# Altium PCB PCB1.PcbDoc
Units mm, origin at the board's own origin, x right, y up, seen from the top; angles counter-clockwise.
Board outline 125.98 x 68.96 mm, 2 copper layers (Top Layer, Bottom Layer); 7 components, 7 nets, 50 pads, 6 vias.
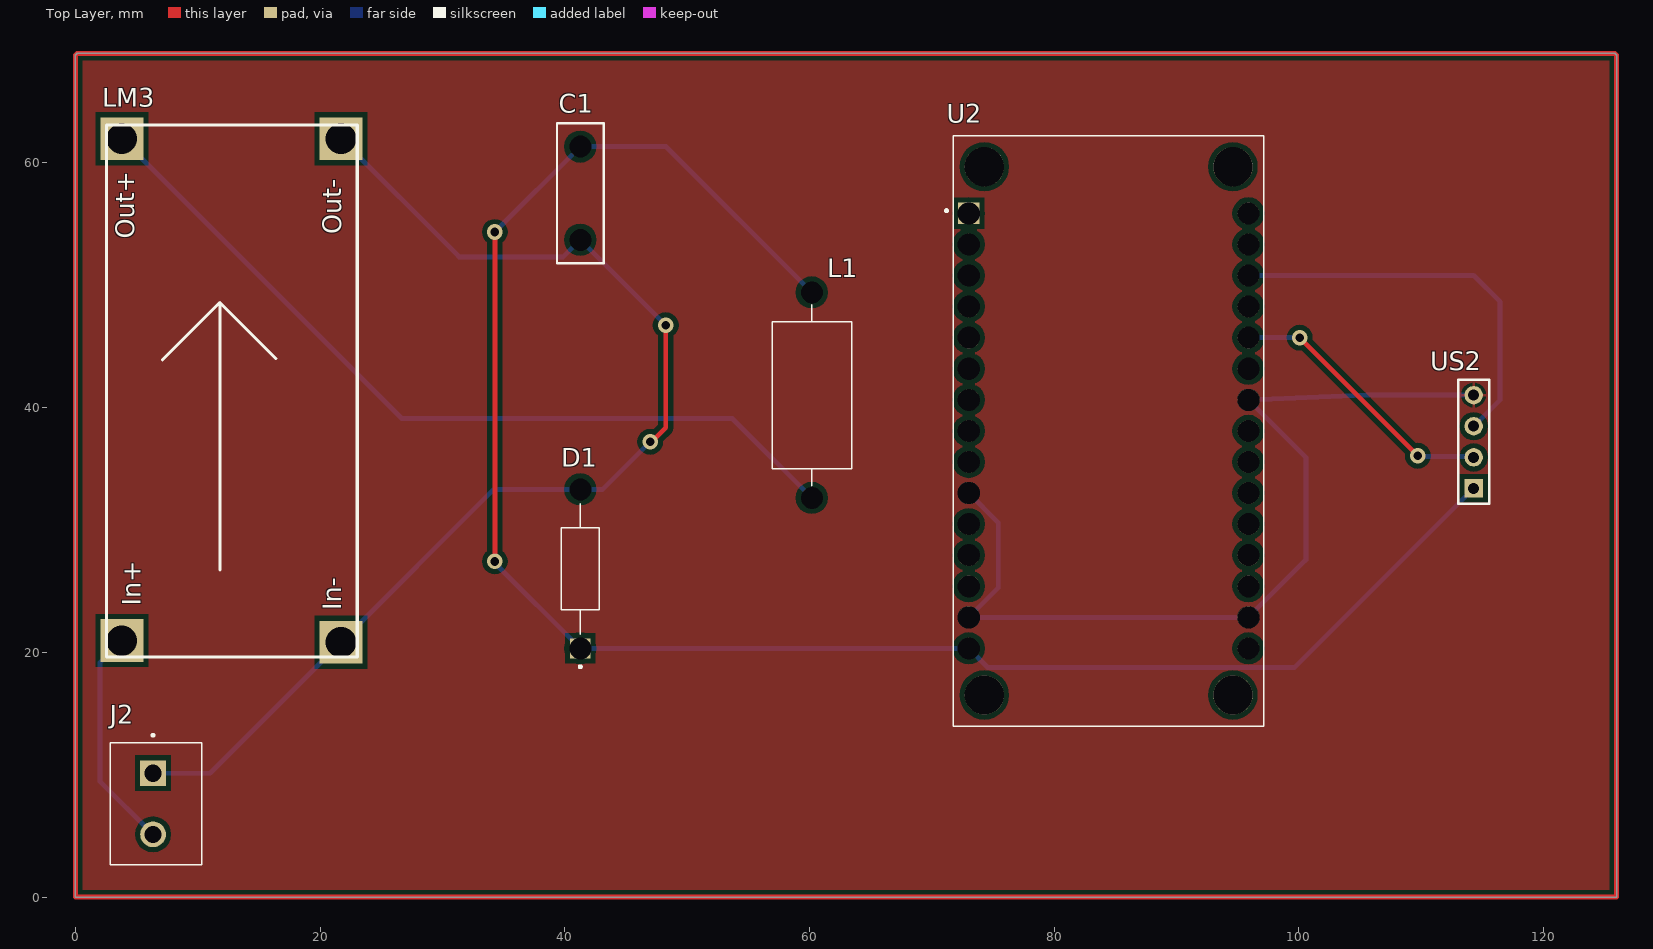
[diagram p0: Top Layer view]
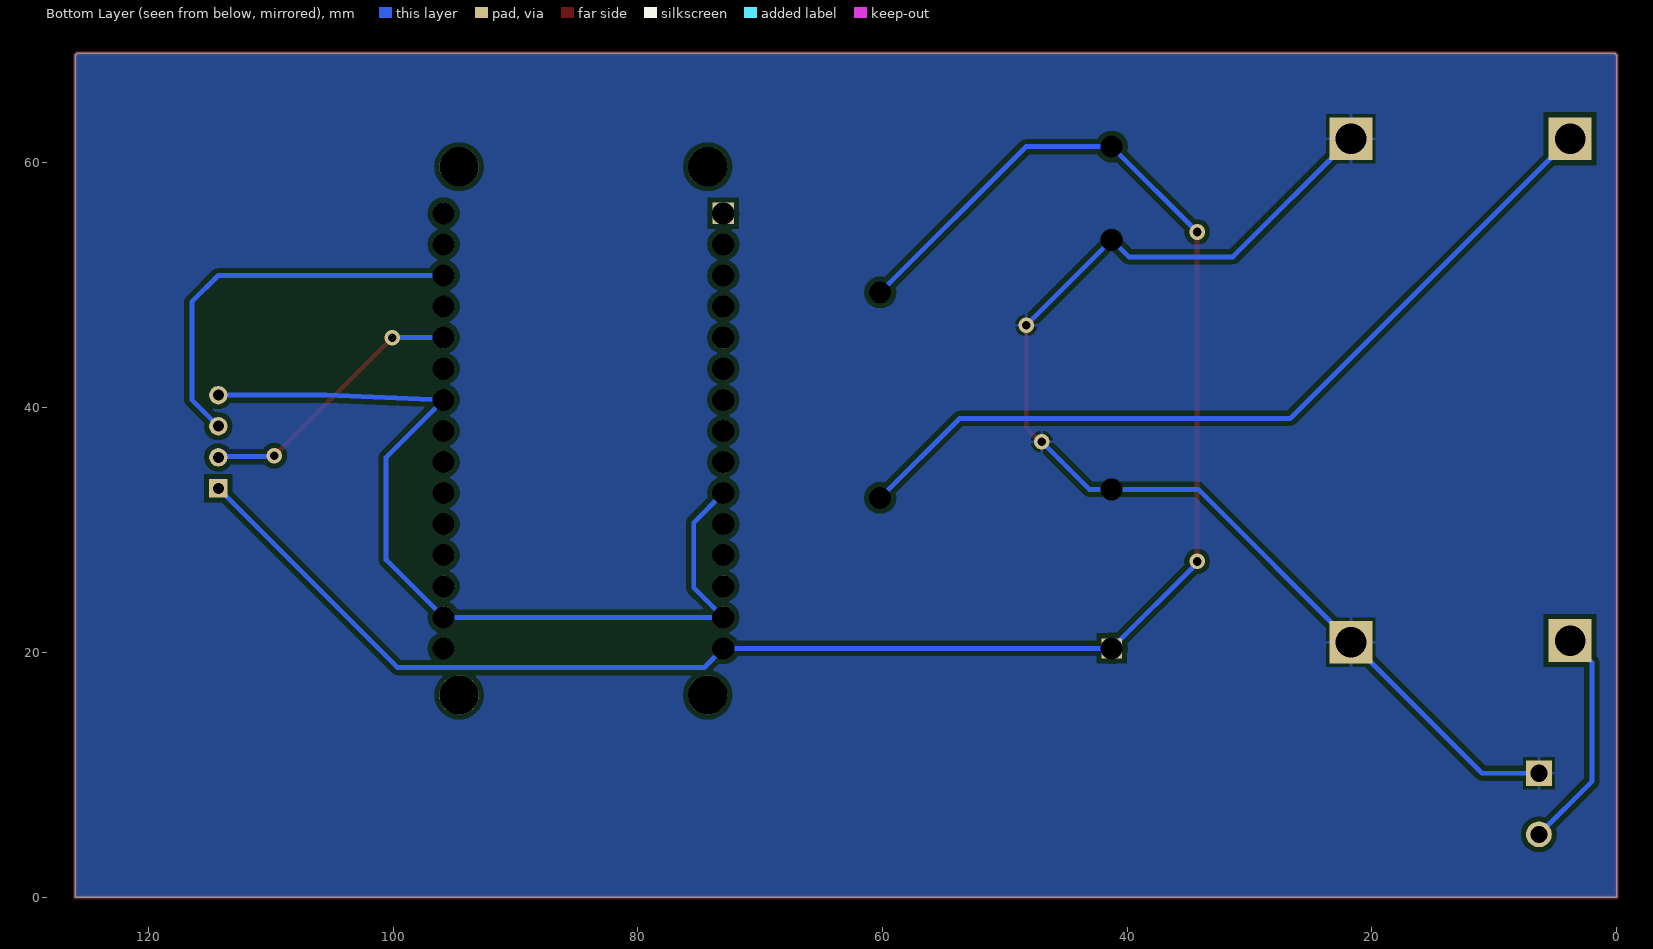
[diagram p1: Bottom Layer view, seen from below]

## Layer stack, top to bottom
Top Solder: solder mask 0.0102, Solder Resist, Dk 3.5
Top Layer: signal copper 0.0356
Dielectric 1: dielectric 0.32, FR-4, Dk 4.8
Bottom Layer: signal copper 0.0356
Bottom Solder: solder mask 0.0102, Solder Resist, Dk 3.5

## Board outline
0,0 0,68.812 0.149,68.961 125.835,68.961 125.984,68.812 125.984,0

## Design rules (kind name [scope] priority, off if disabled: settings)
Clearance PGND [InNamedPolygon('NONET_L01_P001')] p1: gap=0.7 ignorepadtopadclearanceinfootprint=FALSE
Clearance DGND [InNamedPolygon('NONET_L01_P000')] p2: gap=0.7 ignorepadtopadclearanceinfootprint=FALSE
Clearance [All] p3: gap=0.4 ignorepadtopadclearanceinfootprint=FALSE
PolygonConnect [All] p1: connectstyle=Relief reliefconductorwidth=0.254 reliefentries=4 polygonreliefangle="90 Angle" airgapwidth=0.254
RoutingVias [All] p1: holewidth=0.6 width=1.4 viastyle="Through Hole" minholewidth=0.6 minwidth=1.4 maxholewidth=0.6 maxwidth=1.4
SolderMaskExpansion [All] p1: expansion=0.18 istentingtop=FALSE
UnRoutedNet [All] p1: checkbadconnections=TRUE
Width [All] p1: maxlimit=0.4 minlimit=0.4 preferedwidth=0.4
29 further rules are at their usual default settings.

## Components (designator, comment, footprint, x,y, rotation, side; value= is the part's Value field where it differs from the comment)
C1 "Cap" RAD-0.3 41.275,57.531 r90 top value=1500uF
D1 "P6KE6.8A" DIOAD1300W80L670D310 41.275,26.82 r90 top
J2 "KF301-2P" HANDSON_KF301-2P 6.35,7.62 r270 top
L1 "B82145A1474J000" INDAD1680W80L1200D650 60.198,41.021 r90 top value=1mH
LM3 "LM2596-Adj" lm2596 14.859,37.465 r90 top
U2 "ZC563900" MODULE_ZC563900 84.455,38.1 r0 top
US2 "Header 4" HDR1X4 114.3,33.401 r90 top (schematic designator ultrasonic2)

## Footprints (in the part's own frame and the unit in brackets; to place one, negate y for a bottom-side part, rotate by r counter-clockwise, add the part's x,y. Pads: shape width x height; smd on the part's side, far side on the other; paste and mask are expansions set on the pad)
DIOAD1300W80L670D310 [mm]
  round 1.65 hole 1.8: A(6.5,0)
  rect 1.65x1.65 / inner round 1.65 / far side rect 1.65x1.65 hole 1.8: C(-6.5,0)
  silkscreen extent -8.1,-1.55 5.32,1.55
HANDSON_KF301-2P [mm]
  rect 2.1x2.1 / inner round 2.1 / far side rect 2.1x2.1 hole 1.4: 1(-2.5,0)
  round 2.1 hole 1.4: 2(2.5,0)
  silkscreen extent -5.7,-3.5 5,4, body extent -5.6,-3.75 5,3.75, height 10
HDR1X4 [mm] "Connector; Header; 4 Position"
  rect 1.5x1.5 hole 0.9: 1(0,0)
  round 1.5 hole 0.9: 2(2.54,0) 3(5.08,0) 4(7.62,0)
  silkscreen extent -1.27,-1.27 8.89,1.27
INDAD1680W80L1200D650 [mm]
  round 1.35 hole 1.8: 1(-8.4,0) 2(8.4,0)
  silkscreen extent -7.41,-3.25 7.41,3.25, body extent -8.8,-3.25 8.8,3.25, height 6.5
lm2596 [mm]
  rect 3.5x3.5 hole 2.5: 1(-16.51,11.049) 2(-16.637,-6.858) 3(24.511,-6.858) 4(24.511,11.049)
  silkscreen extent -17.85,-8.18 25.65,12.32, body extent -17.81,-8.21 25.69,12.79, height 13.68
MODULE_ZC563900 [mil]
  rect 69x69 / inner round 69 / far side rect 69x69 hole 70.87: 1(-450,700)
  round 69 hole 70.87: 2(-450,600) 3(-450,500) 4(-450,400) 5(-450,300) 6(-450,200) 7(-450,100) 8(-450,0) 9(-450,-100) 10(-450,-200) 11(-450,-300) 12(-450,-400) 13(-450,-500) 14(-450,-600) 15(-450,-700) 16(450,-700) 17(450,-600) 18(450,-500) 19(450,-400) 20(450,-300) 21(450,-200) 22(450,-100) 23(450,0) 24(450,100) 25(450,200) 26(450,300) 27(450,400) 28(450,500) 29(450,600) 30(450,700)
  round 125.98 hole 125.98 unplated: ""(-400,-850) ""(-400,850) ""(400,-850) ""(400,850)
  silkscreen extent -526,-950 500,950
RAD-0.3 [mm] "Radial Cap, Thru-Hole; 2 Leads; 0.3 in Pin Spacing"
  round 1.2 hole 1.8: 1(-3.81,0) 2(3.81,0)
  silkscreen extent -5.71,-1.91 5.71,1.91

## Part data
C1: "Capacitor", LatestRevisionDate=17-Jul-2002, LatestRevisionNote="Re-released for DXP Platform.", PackageDescription="Radial Cap, Thru-Hole; 2 Leads; 0.3 in Pin Spacing", PackageReference=RAD-0.3, Published=8-Jun-2000, Publisher="Altium Limited"
D1: "10.5V Clamp 58.1A Ipp Tvs Diode Through Hole DO-204AC (DO-15)", Package="DO-15 Littelfuse Inc.", Check_prices=https://www.snapeda.com/parts/P6KE6.8A/Littelfuse/view-part/?ref=eda, MF="Littelfuse Inc.", MP=P6KE6.8A, SnapEDA_Link=https://www.snapeda.com/parts/P6KE6.8A/Littelfuse/view-part/?ref=snap
J2: "2 Pin Terminal Block 5mm Pitch", Package=None, Check_prices=https://www.snapeda.com/parts/KF301-2P/Handson+Technology/view-part/?ref=eda, MF="Handson Technology", MP=KF301-2P, SnapEDA_Link=https://www.snapeda.com/parts/KF301-2P/Handson+Technology/view-part/?ref=snap
L1: "470 ÂµH Unshielded Wirewound Inductor 510 mA 1.9Ohm Max Axial", Package=None, Availability="In Stock", Check_prices=https://www.snapeda.com/parts/B82145A1474J000/EPCOS/view-part/?ref=eda, MF=EPCOS, MP=B82145A1474J000, Price=None, Purchase-URL=https://pricing.snapeda.com/search/part/B82145A1474J000/?ref=eda, SnapEDA_Link=https://www.snapeda.com/parts/B82145A1474J000/EPCOS/view-part/?ref=snap
LM3: "Designed By @Alixahedi"
U2: "NodeMcu Lua ESP8266 WIFI Internet of Things Network Development Module Board", Package=None, Availability="Not in stock", Check_prices=https://www.snapeda.com/parts/ZC563900/YKS/view-part/?ref=eda, MF=YKS, MP=ZC563900, Price=None, SnapEDA_Link=https://www.snapeda.com/parts/ZC563900/YKS/view-part/?ref=snap
US2: "Header, 4-Pin", LatestRevisionDate=17-Jul-2002, LatestRevisionNote="Re-released for DXP Platform.", Publisher="Altium Limited"

## Via types
v1: diameter 1.27, hole 0.711, Top Layer to Bottom Layer, 6 vias

## Nets (pads, with @x,y where several pads share a name; then routed paths per layer and width w, separated by ;. In a path a pad name is that pad's centre, name@x,y a point inside that pad or via, vN(x,y) a via of type N, cw(c..) or ccw(c..) an arc to the next point about the centre after c; other vN are vias at no path point)
+5: C1.2 D1.C L1.2 U2.15 US2.1 | length 150.5
  Top Layer w0.4: v1@34.29,27.305 v1(34.29,27.432) v1(34.29,54.356)
  Bottom Layer w0.4: v1(34.29,27.432) 34.29,27.305 D1.C U2.15 74.6,18.745 99.644,18.745 US2.1 ; v1(34.29,54.356) C1.2 48.278,61.341 L1.2
D_GND: U2.10 U2.14 U2.17 U2.24 US2.4 | length 75.1
  Bottom Layer w0.4: U2.10 75.438,30.607 75.438,25.273 U2.14 U2.17 100.584,27.559 100.584,35.941 U2.24 105.486,41.021 US2.4
Echo: U2.28 US2.3 | length 32.5
  Bottom Layer w0.4: U2.28 114.3,50.8 116.459,48.641 116.459,40.64 US2.3
NetJ2_2: J2.2 LM3.1 | length 18.4
  Bottom Layer w0.4: LM3.1 2.032,19.177 2.032,9.438 J2.2
NetL1_1: L1.1 LM3.4 | length 68.5
  Bottom Layer w0.4: LM3.4 26.67,39.116 53.703,39.116 L1.1
P_GND: C1.1 D1.A J2.1 LM3.2 LM3.3 | length 95.9
  Top Layer w0.4: v1@47.117,37.211 48.26,38.354 v1(48.26,46.736)
  Bottom Layer w0.4: J2.1 11.009,10.12 LM3.2 34.209,33.32 D1.A 43.099,33.32 v1(46.99,37.211) ; LM3.3 31.369,52.324 39.878,52.324 C1.1 v1(48.26,46.736)
Trig: U2.26 US2.2 | length 22.6
  Top Layer w0.4: v1(100.076,45.72) v1(109.728,36.068) v1@109.855,35.941
  Bottom Layer w0.4: U2.26 v1(100.076,45.72) ; v1(109.728,36.068) 109.791,36.005 114.236,36.005 US2.2
pads on no net: U2. U2.1 U2.2 U2.3 U2.4 U2.5 U2.6 U2.7 U2.8 U2.9 U2.11 U2.12 U2.13 U2.16 U2.18 U2.19 U2.20 U2.21 U2.22 U2.23 U2.25 U2.27 U2.29 U2.30
copper on no net: | length 389.7
  Top Layer w0.254: 0,68.812 0.149,68.961 ; 125.835,68.961 125.984,68.812
  Top Layer w0.4: 0,68.812 0,0 125.984,0 125.984,68.812 ; 0.149,68.961 125.835,68.961

## Polygon pours and split planes (outlines as drawn)
D_GND on Top Layer "D_GND_L01_P000" (solid, remove dead copper, pour order 0): 0,0 0,68.812 0.149,68.961 125.835,68.961 125.984,68.812 125.984,0
P_GND on Bottom Layer "P_GND_L02_P001" (solid, remove dead copper, pour order 1): 0,0 0,68.812 0.149,68.961 125.835,68.961 125.984,68.812 125.984,0

## Text inside footprints (layer, text, board x,y; h text height)
LM3: Top Overlay "Out+" at 4.826,53.797 h1.52 r90; Top Overlay "Out-" at 21.717,54.178 h1.52 r90; Top Overlay "In-" at 21.717,23.444 h1.52 r90; Top Overlay "In+" at 5.334,23.825 h1.52 r90